# Altium PCB PCB1.PcbDoc
Units mil, origin at the board's own origin, x right, y up, seen from the top; angles counter-clockwise.
Board outline 3690.03 x 3075.03 mil, 2 copper layers (Top Layer, Bottom Layer); 18 components, 50 nets, 143 pads, 26 vias.
Unrouted connection lines stored in the file: 4.
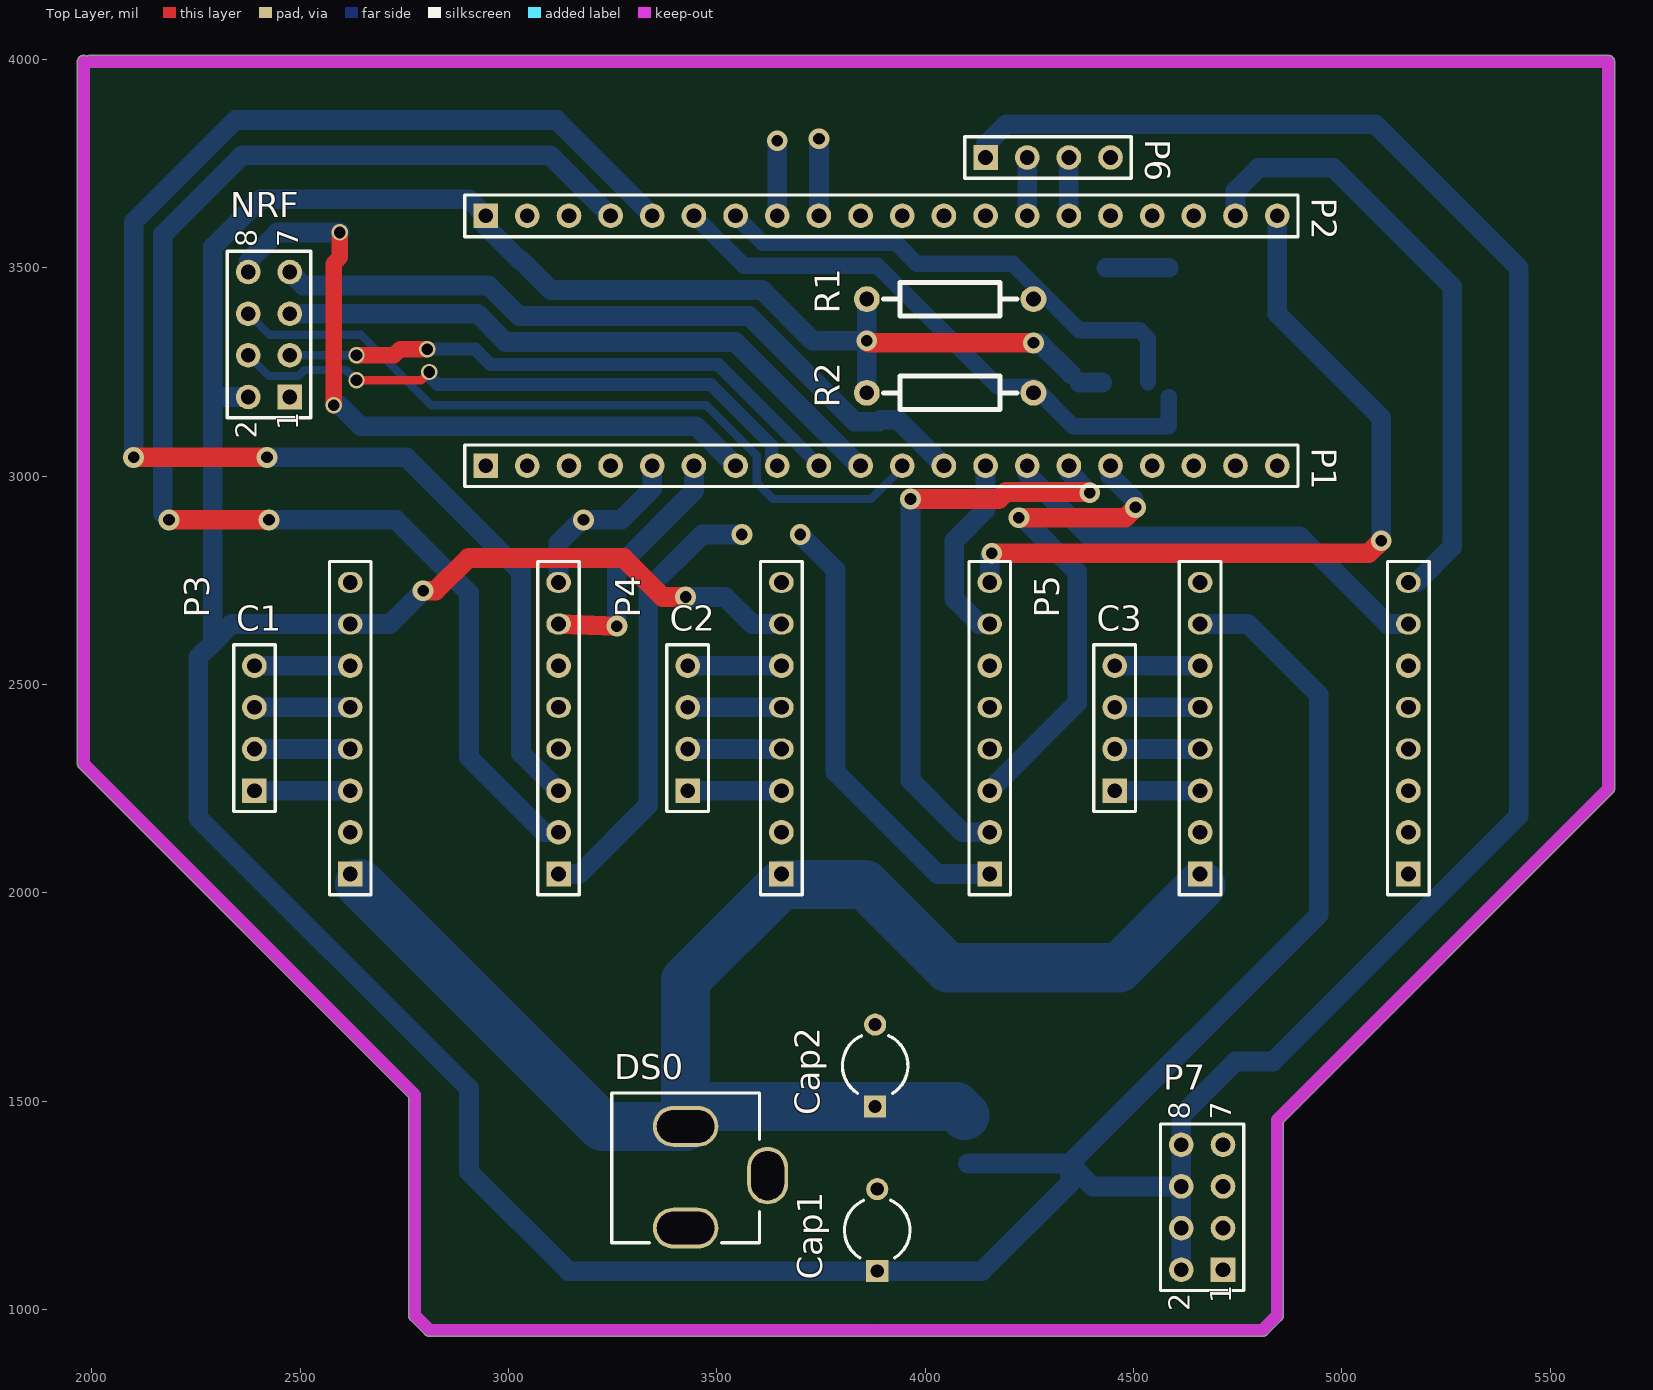
[diagram p0: Top Layer view]
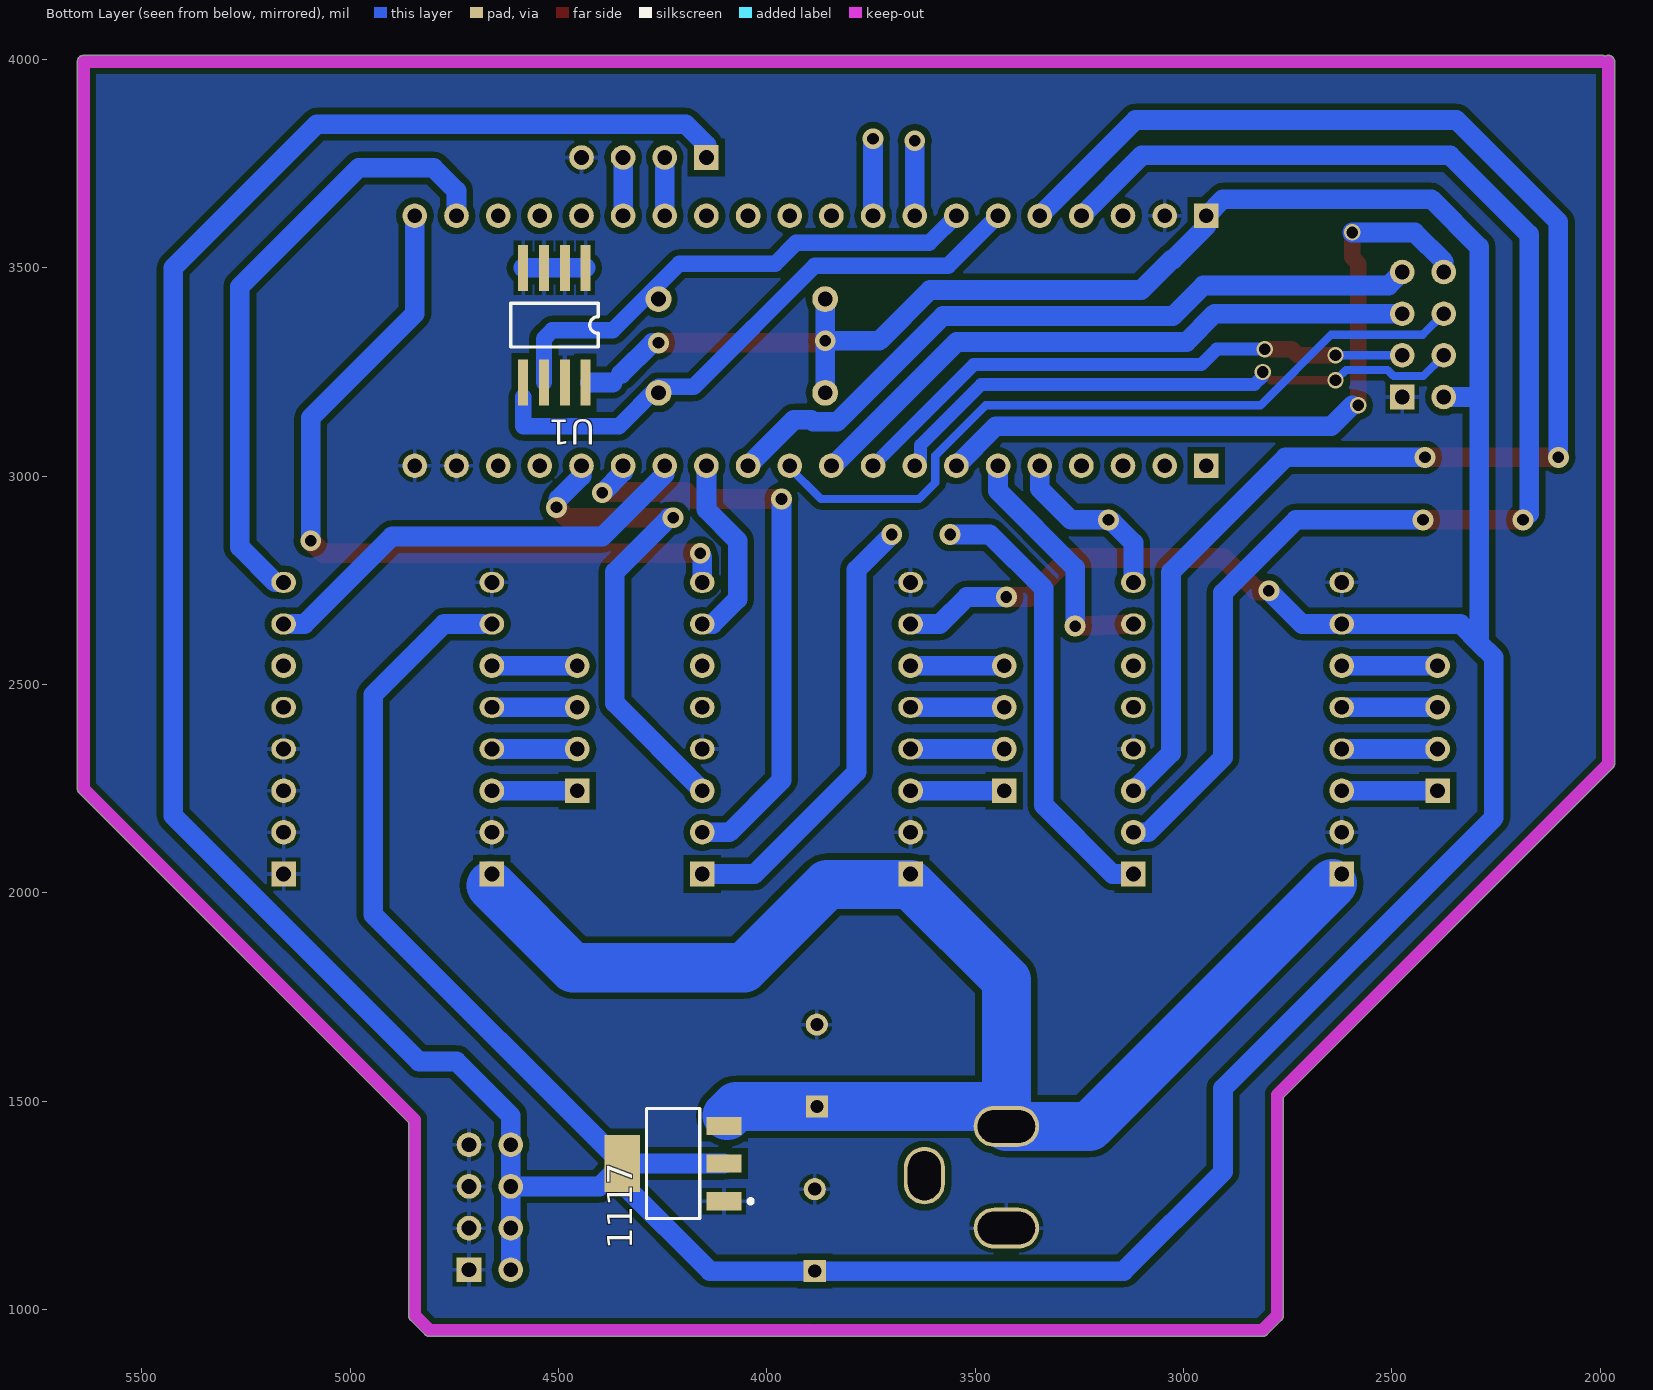
[diagram p1: Bottom Layer view, seen from below]

## Layer stack, top to bottom
Top Solder: solder mask 0.4, Solder Resist, Dk 3.5
Top Layer: signal copper 1.4
Dielectric 1: dielectric 12.6, FR-4, Dk 4.8
Bottom Layer: signal copper 1.4
Bottom Solder: solder mask 0.4, Solder Resist, Dk 3.5

## Board outline
2759.99,985 ccw(c2775,985) 2764.4,974.37 2764.38,974.38 2799.38,939.38 2799.37,939.4 ccw(c2810,950) 2810,934.99 3880,934.99 ccw(c3880,950) 3885,935.84 ccw(c3890,950) 3890,934.99 4810,934.99 ccw(c4810,950) 4820.63,939.4 4820.62,939.38 4855.62,974.38 4855.6,974.37 ccw(c4845,985) 4860.02,985 4860.02,1448.78 5650.62,2239.38 5650.6,2239.37 ccw(c5640,2250) 5655.02,2250 5655.02,3995 ccw(c5640,3995) 5640,4010.01 1995,4010.01 ccw(c1995,3995) 1987.5,4008.01 ccw(c1980,3995) 1964.98,3995 1964.98,2310 ccw(c1980,2310) 1969.4,2299.37 1969.38,2299.38 2759.99,1508.78

## Design rules (kind name [scope] priority, off if disabled: settings)
Clearance [All] p1: gap=15
PolygonConnect [All] p1: connectstyle=Relief reliefconductorwidth=10 reliefentries=4 polygonreliefangle="90 Angle" airgapwidth=10
RoutingVias [All] p1: holewidth=28 width=50 viastyle="Through Hole" minholewidth=28 minwidth=50 maxholewidth=28 maxwidth=50
SolderMaskExpansion [All] p1: expansion=4
Width [All] p1: maxlimit=118.11 minlimit=19.68 preferedwidth=47.24
30 further rules are at their usual default settings.

## Components (designator, comment, footprint, x,y, rotation, side; value= is the part's Value field where it differs from the comment)
1117 "Header 4" SOT-223 4225,1350 r90 bottom
C1 "Header 4" HDR1X4 2390,2245 r90 top
C2 "Header 4" HDR1X4 3430,2245 r90 top
C3 "Header 4" HDR1X4 4455,2245 r90 top
Cap1 "Cap2" CAPR5-4X5 3885,1190 r90 top
Cap2 "Cap2" CAPR5-4X5 3880,1585 r90 top
DS0 "BATTERY" 9V 3425,1439.37 r0 top
NRF "Header 4X2" HDR2X4 2475,3190 r90 top
P1 "Header 20" HDR1X20 2945,3025 r0 top
P2 "Header 20" HDR1X20 2945,3625 r0 top
P3 "Header 8X2A" PCBComponent_1 3174,2804 r180 top
P4 "Header 8X2A" PCBComponent_1 4209,2804 r180 top
P5 "Header 8X2A" PCBComponent_1 5214,2804 r180 top
P6 "Header 4" HDR1X4 4145,3765 r0 top
P7 "Header 4X2" HDR2X4 4715,1095 r90 top
R1 "Res2" R1/4 4260,3425 r180 top
R2 "Res2" R1/4 4260,3200 r180 top
U1 "AT24C02" SOIC8P 4435,3480 r0 bottom

## Footprints (in the part's own frame and the unit in brackets; to place one, negate y for a bottom-side part, rotate by r counter-clockwise, add the part's x,y. Pads: shape width x height; smd on the part's side, far side on the other; paste and mask are expansions set on the pad)
9V [mm]
  oval 4x2.5 hole 2 slot 3.5 at 0 deg: 1(0,-6.207) 2(0,-0.007)
  oval 2.5x3.5 hole 2 slot 3 at 90 deg: 3(5,-3.007)
  silkscreen extent -4.5,-7.11 4.5,2.03, body extent -4.38,-13.84 5.14,0.76, height 10.92
CAPR5-4X5 [mm] "Capacitor; 2 Leads"
  rect 1.35x1.35 hole 0.8: 1(-2.5,0)
  round 1.35 hole 0.8: 2(2.5,0)
  silkscreen extent -1.69,-2 1.82,2
HDR1X4 [mm] "Connector; Header; 4 Position"
  rect 1.5x1.5 hole 0.9: 1(0,0)
  round 1.5 hole 0.9: 2(2.54,0) 3(5.08,0) 4(7.62,0)
  silkscreen extent -1.27,-1.27 8.89,1.27
HDR1X20 [mm] "Connector; Header; 20 Position"
  rect 1.5x1.5 hole 0.9: 1(0,0)
  round 1.5 hole 0.9: 2(2.54,0) 3(5.08,0) 4(7.62,0) 5(10.16,0) 6(12.7,0) 7(15.24,0) 8(17.78,0) 9(20.32,0) 10(22.86,0) 11(25.4,0) 12(27.94,0) 13(30.48,0) 14(33.02,0) 15(35.56,0) 16(38.1,0) 17(40.64,0) 18(43.18,0) 19(45.72,0) 20(48.26,0)
  silkscreen extent -1.27,-1.27 49.53,1.27
HDR2X4 [mm] "Connector; Header; 4x2 Position"
  rect 1.5x1.5 hole 0.9: 1(0,0)
  round 1.5 hole 0.9: 2(0,2.54) 3(2.54,0) 4(2.54,2.54) 5(5.08,0) 6(5.08,2.54) 7(7.62,0) 8(7.62,2.54)
  silkscreen extent -1.27,-1.27 8.89,3.81
PCBComponent_1 [mm] "Connector; Header; 8x2 Position"
  rect 1.5x1.5 hole 0.9: 1(1.372,19.279) 9(14.072,19.279)
  round 1.5 hole 0.9: 2(1.372,16.739) 3(1.372,14.199) 6(1.372,6.579) 10(14.072,16.739) 11(14.072,14.199) 14(14.072,6.579)
  oval 1.5x1.27 hole 0.9: 4(1.372,11.659) 5(1.372,9.119) 7(1.372,4.039) 8(1.372,1.499) 12(14.072,11.659) 13(14.072,9.119) 15(14.072,4.039) 16(14.072,1.499)
  silkscreen extent 0.1,0.23 15.34,20.55, body extent 0.1,0.23 15.21,20.55, height 0.7
R1/4 [mil]
  round 62 hole 35.43: 1(0,0) 2(400,0)
  silkscreen extent 40,-40 360,40
SOIC8P [mil]
  rect 24x110 smd: 1(0,-20) 2(50,-20) 3(100,-20) 4(150,-20) 5(150,255) 6(100,255) 7(50,255) 8(0,255)
  silkscreen extent -30,65 180,170, body extent -24,-4 174,234, height 63
SOT-223 [mm] "SOT-223/SC-73; 4 Leads; Body 6.7 x 7.3 mm, inc. leads (LxW max)"
  rect 1.1x2.15 smd: 1(-2.3,-3.1) 2(0,-3.1) 3(2.3,-3.1)
  rect 3.5x2.15 smd: 4(0,3.1)
  silkscreen extent -3.35,-4.85 3.35,1.63, body extent -3.25,-3.58 3.25,3.38, height 1.65

## Part data
1117 C1 C2 C3 P6: "Header, 4-Pin"
Cap1 Cap2: "Capacitor"
NRF P7: "Header, 4-Pin, Dual row"
P1 P2: "Header, 20-Pin"
P3 P4 P5: "Header, 8-Pin, Dual row"
R1 R2: "Resistor"
U1: "EEROM存储器"

## Via types
v1: diameter 50, hole 28, Top Layer to Bottom Layer, 20 vias
v2: diameter 39.37, hole 28, Top Layer to Bottom Layer, 6 vias

## Nets (pads, with @x,y where several pads share a name; then routed paths per layer and width w, separated by ;. In a path a pad name is that pad's centre, name@x,y a point inside that pad or via, vN(x,y) a via of type N, cw(c..) or ccw(c..) an arc to the next point about the centre after c; other vN are vias at no path point)
3V3: 1117.2 1117.4 Cap1.1 NRF.2 P1.18 P2.1 P3.15 P4.15 P5.15 P6.1 P7.2 P7.4 P7.6 P7.8 R1.2 R2.2 U1.8 | length 14843.7
  Top Layer w47.24: v1(2795,2725) 2825,2725 2903.62,2803.62 3276.38,2803.62 3370,2710 v1(3425,2710) ; v1(3860,3325) 3865,3320 v1(4260,3320)
  Bottom Layer w47.24: NRF.2 2290,3190 ; v1@2790,2720 2715,2645 P3.15 2335,2645 2290,2600 ; v1(3425,2710) 3520,2710 3585,2645 P4.15 ; R2.2 v1@3860,3310 ; R1.2 v1(3860,3325) 3730,3325 3608.31,3446.69 3101.33,3446.69 3028.03,3520 3025,3520 2945,3600 P2.1 2905,3665 2405,3665 2290,3550 2290,3190 ; 1117.2 1117.4 ; P6.1 4145,3795 4195,3845 5080,3845 5425,3500 5425,2185 4835,1595 4745,1595 4615,1465 P7.8 P7.6 ; v1(4260,3320) 4275,3320 4350,3245 ; 4370,3225 U1.8@4425,3225 ; P7.2 P7.4 P7.6 ; P5.15@4680,2645 4775,2645 4945,2475 4945,1947.95 1117.4 ; 2290,2600 2290,3190 ; 2290,2600 2255,2565 2255,2180 2905,1530 2905,1330 3143.43,1091.57 Cap1.1 4136.57,1091.57 4347.05,1302.05 1117.4 ; 1117.4 4402.05,1295 P7.6
5V: P2.3
20V: 1117.3 Cap2.1 DS0.2 P3.9 P4.9 P5.9 | length 3571.1
  Bottom Layer w118.11: P3.9@2642.5,2022.5 3225.91,1439.09 DS0.2 ; 4095,1465 4073.43,1486.57 Cap2.1 3472.48,1486.57 DS0.2 ; P5.9@4662.5,2017.5 4465,1820 4055,1820 3855,2020 3655,2020 3425,1790 DS0.2
DIRX: P1.5 P3.8 | length 416.8
  Bottom Layer w47.24: P3.8 3120,2840 v1@3170,2890 ; v1(3180,2895) 3270,2895 3345,2970 P1.5
DIRY: P2.20 P4.8 | length 1881
  Top Layer w47.24: v1(4160,2815) 5065,2815 v1(5095,2845)
  Bottom Layer w47.24: P4.8 v1@4155,2805 ; P2.20 4845,3390 5095,3140 v1@5095,2855
DIRZ: P2.19 P5.8 | length 1466
  Bottom Layer w47.24: P2.19 4745,3685 4800,3740 4980,3740 5265,3455 5265,2830 P5.8@5180,2745
GND: 1117.1 Cap1.2 Cap2.2 DS0.1 NRF.1 P1.19 P1.20 P2.2 P3.4 P3.10 P3.16 P4.4 P4.10 P4.16 P5.1 P5.2 P5.3 P5.4 P5.10 P5.16 P6.4 P7.1 P7.3 P7.5 P7.7 U1.1 U1.2 U1.3 U1.4 U1.7 | length 150
  Bottom Layer w47.24: U1.1 U1.4
NetC1_1: C1.1 P3.11 | length 230
  Bottom Layer w47.24: C1.1 P3.11
NetC1_2: C1.2 P3.12 | length 230
  Bottom Layer w47.24: C1.2 P3.12
NetC1_3: C1.3 P3.13 | length 230
  Bottom Layer w47.24: C1.3 P3.13
NetC1_4: C1.4 P3.14 | length 230
  Bottom Layer w47.24: C1.4 P3.14
NetC2_1: C2.1 P4.11 | length 225
  Bottom Layer w47.24: C2.1 P4.11
NetC2_2: C2.2 P4.12 | length 225
  Bottom Layer w47.24: C2.2 P4.12
NetC2_3: C2.3 P4.13 | length 225
  Bottom Layer w47.24: C2.3 P4.13
NetC2_4: C2.4 P4.14 | length 225
  Bottom Layer w47.24: C2.4 P4.14
NetC3_1: C3.1 P5.11 | length 205
  Bottom Layer w47.24: C3.1 P5.11
NetC3_2: C3.2 P5.12 | length 205
  Bottom Layer w47.24: C3.2 P5.12
NetC3_3: C3.3 P5.13 | length 205
  Bottom Layer w47.24: C3.3 P5.13
NetC3_4: C3.4 P5.14 | length 205
  Bottom Layer w47.24: C3.4 P5.14
NRF_CE: NRF.3 P1.9 | length 1382.8
  Top Layer w39.37: v2(2635,3290) 2725,3290 2740,3305 v2(2805,3305)
  Bottom Layer w19.68: NRF.3 v2@2625,3290
  Bottom Layer w31.5: v2(2805,3305) 2920,3305 2957.17,3267.83 3503.25,3267.83 3745,3026.09 P1.9
NRF_CSN: NRF.4 P1.8 | length 1427.7
  Top Layer w19.68: v2(2635,3230) 2790,3230 v2(2810,3250)
  Bottom Layer w19.68: NRF.4 2424.37,3240.63 2495.45,3240.63 2509.82,3255 2610,3255 v2@2630,3235
  Bottom Layer w31.5: v2(2810,3250) 2810,3240 2830,3220 3485.33,3220 3631.22,3074.11 3631.22,3038.78 P1.8
NRF_IRQ: NRF.8 P1.7 | length 1705.3
  Top Layer w39.37: v2(2580,3170) 2580,3510 2595,3525 v2(2595,3585)
  Bottom Layer w47.24: NRF.8 2375,3515 2445,3585 v2(2595,3585) ; v2@2595,3170 2645,3120 3450,3120 P1.7
NRF_MISO: NRF.7 P1.12 | length 1766.8
  Bottom Layer w47.24: NRF.7 2507.24,3457.76 2952.24,3457.76 3025.55,3384.45 3577.09,3384.45 3831.16,3130.38 3888.84,3130.38 3893.84,3135.38 3934.62,3135.38 P1.12
NRF_MOSI: NRF.6 P1.11 | length 1855.5
  Bottom Layer w19.68: NRF.6 2425.63,3339.37 2645.63,3339.37 2815,3170 3475,3170 3595.63,3049.37 3595.63,2984.37 3635,2945 3870,2945 3950,3025 P1.11 P1.11@3925,3025
NRF_SCK: NRF.5 P1.10 | length 1521.2
  Bottom Layer w47.24: NRF.5 2925,3390 2992.8,3322.2 3544.17,3322.2 3841.38,3025 P1.10
NRST: P1.17
PA1: P1.6 P3.7 | length 601.7
  Top Layer w47.24: P3.7 v1(3260,2640)
  Bottom Layer w47.24: v1(3260,2640) 3260,2780 3445,2965 P1.6
PA8: P2.16
PA9: P2.15 P6.3 | length 140
  Bottom Layer w47.24: P2.15 P6.3
PA10: P2.14 P6.2 | length 140
  Bottom Layer w47.24: P2.14 P6.2
PA11: P2.13
PA12: P2.12
PA15: P2.11
PB0: P1.13 P4.7 | length 460.9
  Bottom Layer w47.24: P1.13 4145,2920 4070,2845 4070,2705 4130,2645 P4.7
PB1: P1.14 P5.7 | length 1084.1
  Bottom Layer w47.24: P1.14 4245,3005 4395,2855 4900,2855 5110,2645 P5.7
PB3: P2.10
PB4: P2.9 P4.1 | length 1246.7
  Bottom Layer w47.24: v1(3700,2860) 3785,2775 3785,2290 4030,2045 P4.1 ; P2.9 v1@3745,3795
  other v1: 3745,3810
PB5: P2.8 P3.1 | length 1247.2
  Bottom Layer w47.24: P3.1 3170,2045 3335,2210 3335,2730 3465,2860 v1(3560,2860) ; P2.8 v1@3645,3790
  other v1: 3645,3805
PB6: P2.7 R1.1 U1.6 | length 1217.2
  Bottom Layer w39.37: P2.7 3610,3560 3930,3560 3980,3510 4210,3510 4370,3350 4515,3350 4535,3330 U1.6
PB7: P2.6 R2.1 U1.5 | length 1419.2
  Bottom Layer w39.37: P2.6 3565,3505 3885,3505 4175,3215 4260,3215 4355,3120 4585,3120 U1.5@4585,3190
PB8: P2.5 P3.3 | length 3612.9
  Top Layer w47.24: v1(2100,3045) v1(2420,3045)
  Bottom Layer w47.24: v1(2100,3045) 2100,3610 2345,3855 3115,3855 P2.5 ; v1(2420,3045) 2755,3045 3030,2770 3030,2335 P3.3
PB9: P2.4 P3.2 | length 3382
  Top Layer w47.24: v1(2185,2895) v1(2425,2895)
  Bottom Layer w47.24: v1(2185,2895) 2170,2910 2170,3580 2360,3770 3100,3770 P2.4 ; v1(2425,2895) 2730,2895 2905,2720 2905,2325 3085,2145 P3.2
PB10: P1.15 P4.2 | length 1440.2
  Top Layer w47.24: v1(3965,2945) 4177.1,2945 4193.95,2961.85 4393.15,2961.85 v1(4395,2960)
  Bottom Layer w47.24: v1(3965,2945) 3965,2270 4090,2145 P4.2 ; P1.15 4345,3010 v1(4395,2960)
PB11: P1.16 P4.3 | length 1199
  Top Layer w47.24: v1(4225,2900) 4480,2900 v1(4505,2925)
  Bottom Layer w47.24: P4.3 4365,2455 4365,2770 4235,2900 v1(4225,2900) ; P1.16 4445,3000 v1@4500,2945
PB14: P2.18
PB15: P2.17
PC13: P1.2
PC14: P1.3
PC15: P1.4
VBAT: P1.1
pads on no net: DS0.3 P3.5 P3.6 P4.5 P4.6 P5.5 P5.6

## Polygon pours and split planes (outlines as drawn)
GND on Bottom Layer "AutoNaming" (solid, remove dead copper, pour order 6): 1980,3995 1980,2310 1990,2310 2775,1525 2765,1515 2765,995 2810,950 4810,950 4845,985 4845,1455 4845,1460 5640,2255 5640,3995

## Keep-outs
Keep-Out Layer:
  lines w30: 1980,3995 1980,2310 2775,1515 2775,985 2810,950 3880,950 ; 1995,3995 5640,3995 5640,2250 4845,1455 4845,985 4810,950 3890,950

## Text inside footprints (layer, text, board x,y; h text height)
NRF: Top Overlay "2" at 2395,3090 h50 r90; Top Overlay "1" at 2495,3110 h50 r90; Top Overlay "7" at 2495,3550 h50 r90; Top Overlay "8" at 2395,3550 h50 r90
P7: Top Overlay "2" at 4635,995 h50 r90; Top Overlay "1" at 4735,1015 h50 r90; Top Overlay "7" at 4735,1455 h50 r90; Top Overlay "8" at 4635,1455 h50 r90